# Altium PCB Transceiver.PcbDoc (part 1 of 2)
Units mm, origin at the board's own origin, x right, y up, seen from the top; angles counter-clockwise.
Board outline 140 x 70 mm, 2 copper layers (Top Layer, Bottom Layer); 116 components, 126 nets, 485 pads, 156 vias.
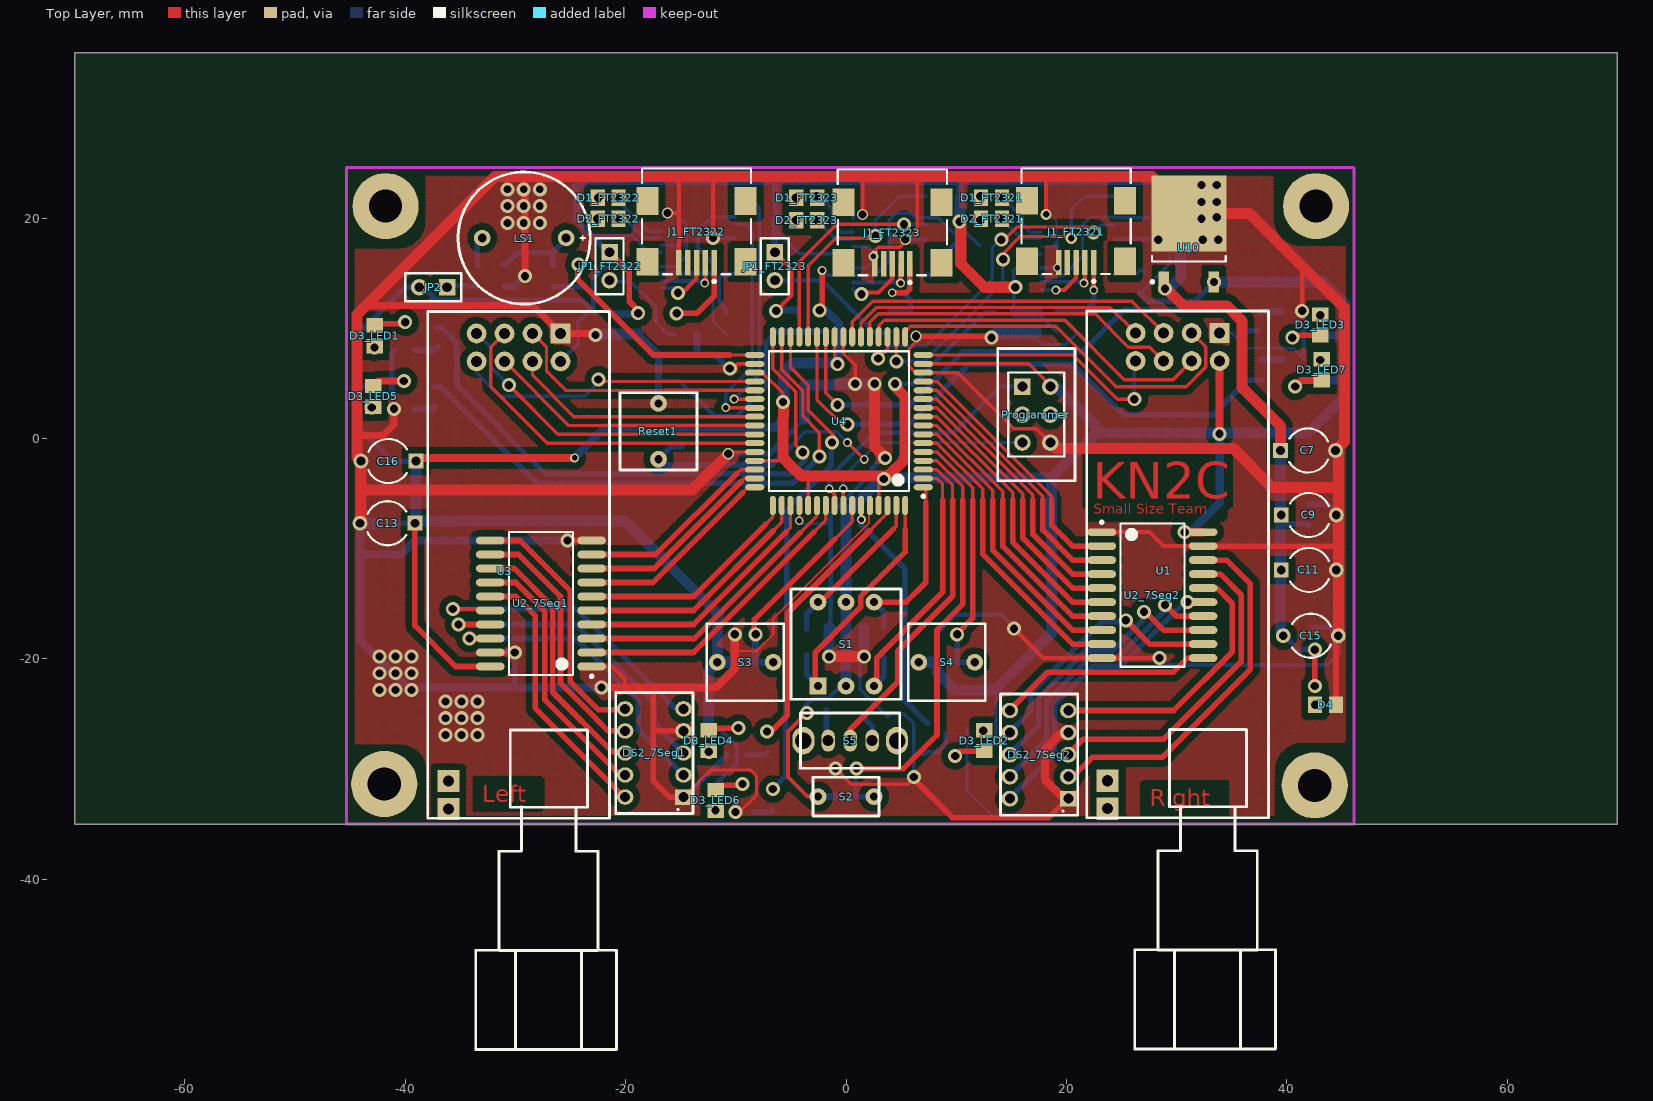
[diagram p0: Top Layer view]
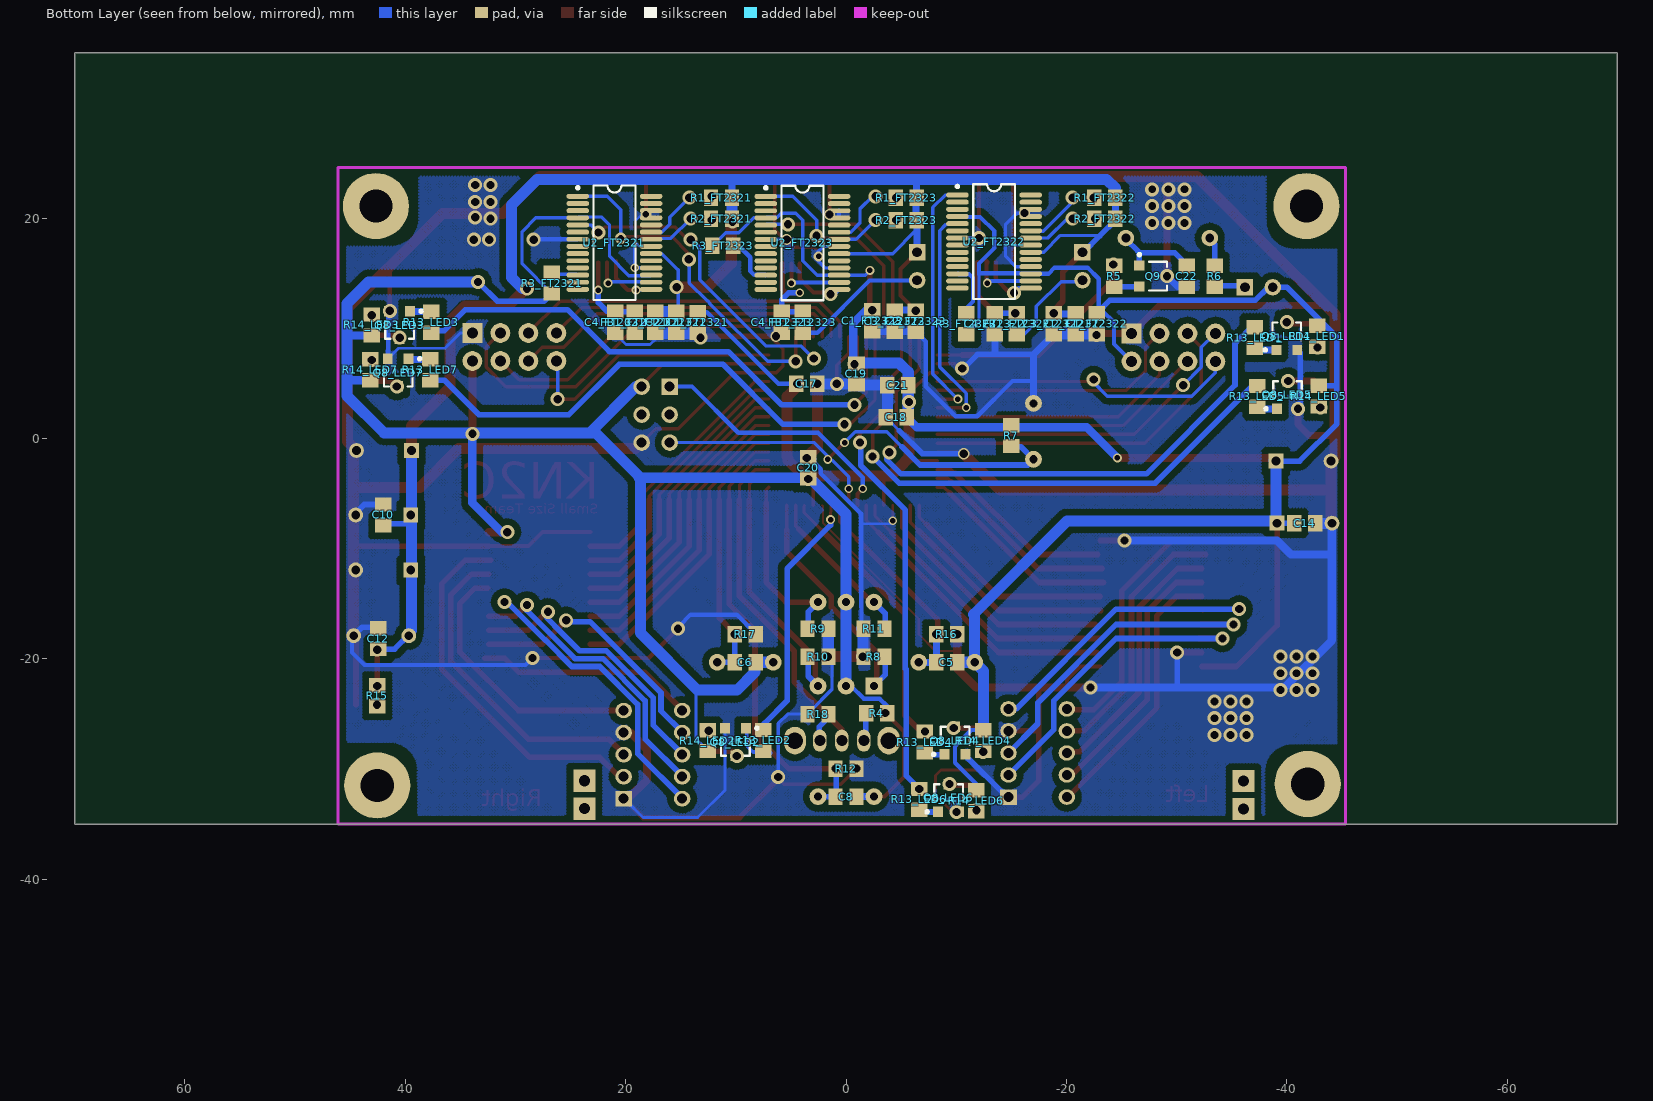
[diagram p1: Bottom Layer view, seen from below]

## Layer stack, top to bottom
Top Solder: solder mask 0.0102, Solder Resist, Dk 3.5
Top Layer: signal copper 0.0356
Dielectric1: dielectric 0.32, FR-4, Dk 4.8
Bottom Layer: signal copper 0.0356
Bottom Solder: solder mask 0.0102, Solder Resist, Dk 3.5

## Board outline
-70,-35 70,-35 70,35 -70,35

## Design rules (kind name [scope] priority, off if disabled: settings)
Clearance Clearance_1 [InPolygon] p1: gap=0.6
Clearance [All] p2: gap=0.2
FabricationTestPointUsage TestPointUsage [All] p1: valid=0 allowmultiple=FALSE
FabricationTestpoint Testpoint [All] p1: side=3 testpointundercomponent=TRUE minsize=1.016 maxsize=2.54 preferedsize=1.524 minholesize=0 maxholesize=1.016 preferedholesize=0.813 testpointgrid=0.025 allowsidetop=TRUE allowsidebottom=TRUE usegrid=TRUE gridtolerance=0
HoleSize [All] p1: absolutevalues=TRUE maxlimit=3 minlimit=0.025 maxpercent=80.000 minpercent=20.000
PolygonConnect [All] p1: connectstyle=Direct reliefconductorwidth=0.254 reliefentries=4 polygonreliefangle="90 Angle" airgapwidth=0.254
RoutingVias [All] p1: holewidth=0.5 width=1 viastyle="Through Hole" minholewidth=0.5 minwidth=0.5 maxholewidth=0.5 maxwidth=1
SilkToSolderMaskClearance SilkscreenOverComponentPads [IsPad] p1: minsilkscreentomaskgap=0.254 clearancetoexposedcopper=TRUE
SolderMaskExpansion [All] p1: expansion=0.102
Width [All] p1: maxlimit=2 minlimit=0.2 preferedwidth=0.5
25 further rules are at their usual default settings.

## Classes and differential pairs
channel class LED: LED1 LED2 LED3 LED4 LED5
net class LED[7..1]: LED1 LED2 LED3 LED4 LED5 LED6 LED7
component class Transceiver: C5 C6 C7 C8 C9 C10 C11 C12 C13 C14 C15 C16 C17 C18 C19 C20 C21 C22 C? CH1 D4 JP2 LS1 Programmer Q9 R4 R5 R6 R7 R8 R9 R10 R11 R12 R15 R16 R17 R18 Reset1 S1 S2 S3 S4 S5 U1 U3 U4 U9 U10 U11
component class LED4: D3_LED4 Q8_LED4 R13_LED4 R14_LED4
component class LED3: D3_LED3 Q8_LED3 R13_LED3 R14_LED3
component class LED2: D3_LED2 Q8_LED2 R13_LED2 R14_LED2
component class LED1: D3_LED1 Q8_LED1 R13_LED1 R14_LED1
component class 7Seg2: 3_7Seg2 DS2_7Seg2 U2_7Seg2
component class 7Seg1: 3_7Seg1 DS2_7Seg1 U2_7Seg1
channel class 7Seg: 7Seg1 7Seg2
net class RX[1..3]: RX1 RX2 RX3
net class TX[1..3]: TX1 TX2 TX3
component class LED5: D3_LED5 Q8_LED5 R13_LED5 R14_LED5
component class LED6: D3_LED6 Q8_LED6 R13_LED6 R14_LED6
component class LED7: D3_LED7 Q8_LED7 R13_LED7 R14_LED7
net class A[1..2]: A1 A2
net class B[1..2]: B1 B2
net class C[1..2]: C1 C2
net class D[1..2]: D1 D2
net class DP[1..2]: DP1 DP2
net class E[1..2]: E1 E2
net class F[1..2]: F1 F2
net class G[1..2]: G1 G2
component class FT2321: C1_FT2321 C2_FT2321 C3_FT2321 C4_FT2321 D1_FT2321 D2_FT2321 FB1_FT2321 J1_FT2321 R1_FT2321 R2_FT2321 R3_FT2321 U2_FT2321
component class FT2322: C1_FT2322 C2_FT2322 C3_FT2322 C4_FT2322 D1_FT2322 D2_FT2322 FB1_FT2322 J1_FT2322 JP1_FT2322 R1_FT2322 R2_FT2322 R3_FT2322 U2_FT2322
component class FT2323: C1_FT2323 C2_FT2323 C3_FT2323 C4_FT2323 D1_FT2323 D2_FT2323 FB1_FT2323 J1_FT2323 JP1_FT2323 R1_FT2323 R2_FT2323 R3_FT2323 U2_FT2323
channel class FT232: FT2321 FT2322 FT2323

## Components (designator, comment, footprint, x,y, rotation, side; value= is the part's Value field where it differs from the comment)
C1_FT2321 "Cap_UP" 2012[0805] 13.462,10.523 r90 bottom (schematic designator C1)
C1_FT2322 "Cap_UP" 2012[0805] -22.777,10.414 r90 bottom (schematic designator C1)
C1_FT2323 "Cap_UP" 2012[0805] -2.384,10.668 r90 bottom (schematic designator C1)
C2_FT2321 "Cap_UP" 2012[0805] 15.423,10.541 r90 bottom (schematic designator C2)
C2_FT2322 "Cap_UP" 2012[0805] -20.841,10.414 r90 bottom (schematic designator C2)
C2_FT2323 "Cap_UP" 2012[0805] -6.342,10.627 r90 bottom (schematic designator C2)
C3_FT2321 "Cap_El" 2012[0805] 17.315,10.541 r270 bottom (schematic designator C3)
C3_FT2322 "Cap_El" 2012[0805] -18.861,10.414 r270 bottom (schematic designator C3)
C3_FT2323 "Cap_El" 2012[0805] -4.437,10.627 r270 bottom (schematic designator C3)
C4_FT2321 "Cap_UP" 2012[0805] 20.955,10.541 r90 bottom (schematic designator C4)
C4_FT2322 "Cap_UP" 2012[0805] -13.503,10.414 r90 bottom (schematic designator C4)
C4_FT2323 "Cap_UP" 2012[0805] 5.842,10.541 r90 bottom (schematic designator C4)
C5 "Cap_UP" 2012[0805] -9.144,-20.32 r180 bottom
C6 "Cap_UP" 2012[0805] 9.144,-20.32 r180 bottom
C7 "Cap_El" EL_M#1 41.923,-1.099 r0 top
C8 "Cap_UP" 2012[0805] 0,-32.512 r180 bottom
C9 "Cap_El" EL_M#1 42.002,-6.955 r0 top
C10 "Cap_UP" 2012[0805] 42.002,-6.955 r270 bottom
C11 "Cap_El" EL_M#1 42.001,-11.938 r0 top
C12 "Cap_UP" 2012[0805] 42.435,-18.175 r270 bottom
C13 "Cap_El" EL_M#1 -41.606,-7.698 r180 top
C14 "Cap_UP" 2012[0805] -41.631,-7.711 r0 bottom
C15 "Cap_El" EL_M#2 42.18,-17.907 r0 top
C16 "Cap_El" EL_M#1 -41.529,-2.056 r180 top
C17 "Cap_UP" 2012[0805] 3.556,4.953 r0 bottom
C18 "Cap_UP" 2012[0805] -4.572,1.905 r180 bottom
C19 "Cap_UP" 2012[0805] -0.952,5.842 r90 bottom
C20 "Cap_UP" 2012[0805] 3.429,-2.667 r270 bottom
C21 "Cap_UP" 2012[0805] -4.699,4.826 r180 bottom
C22 "Cap_UP" 2012[0805] -30.931,14.724 r270 bottom
D1_FT2321 "Diode" 2012[0805] 13.208,21.844 r0 top (schematic designator D1)
D1_FT2322 "Diode" 2012[0805] -21.59,21.844 r0 top (schematic designator D1)
D1_FT2323 "Diode" 2012[0805] -3.568,21.832 r0 top (schematic designator D1)
D2_FT2321 "Diode" 2012[0805] 13.208,19.939 r0 top (schematic designator D2)
D2_FT2322 "Diode" 2012[0805] -21.59,19.939 r0 top (schematic designator D2)
D2_FT2323 "Diode" 2012[0805] -3.556,19.812 r0 top (schematic designator D2)
D3_LED1 "LED2" 2012[0805] -42.769,9.302 r90 top (schematic designator D3)
D3_LED2 "LED2" 2012[0805] 12.545,-27.432 r270 top (schematic designator D3)
D3_LED3 "LED2" 2012[0805] 43.053,10.292 r270 top (schematic designator D3)
D3_LED4 "LED2" 2012[0805] -12.477,-27.432 r90 top (schematic designator D3)
D3_LED5 "LED2" 2012[0805] -42.926,3.81 r90 top (schematic designator D3)
D3_LED6 "LED2" 2012[0805] -11.841,-32.863 r90 top (schematic designator D3)
D3_LED7 "LED2" 2012[0805] 43.18,6.228 r270 top (schematic designator D3)
D4 "Diode" 2012[0805] 43.524,-24.166 r0 top
DS2_7Seg1 "7Seg Blue-CC" "7Segment Small" -17.399,-28.555 r0 top (schematic designator DS2)
DS2_7Seg2 "7Seg Blue-CC" "7Segment Small" 17.526,-28.702 r0 top (schematic designator DS2)
FB1_FT2321 "Ferrite Beed" 2012[0805] 19.177,10.541 r90 bottom (schematic designator FB1)
FB1_FT2322 "Ferrite Beed" 2012[0805] -15.494,10.403 r90 bottom (schematic designator FB1)
FB1_FT2323 "Ferrite Beed" 2012[0805] 3.937,10.541 r90 bottom (schematic designator FB1)
J1_FT2321 "USB" USB_Mini 20.888,19.905 r180 top (schematic designator J1)
J1_FT2322 "USB" USB_Mini -13.56,19.892 r180 top (schematic designator J1)
J1_FT2323 "USB" USB_Mini 4.207,19.8 r180 top (schematic designator J1)
JP1_FT2322 "JUMPER" HDR1X2 -21.463,16.891 r270 top (schematic designator JP1)
JP1_FT2323 "JUMPER" HDR1X2 -6.46,16.891 r270 top (schematic designator JP1)
JP2 "JUMPER" HDR1X2 -36.195,13.716 r180 top
LS1 "Buzzer" BUZZER -29.21,18.183 r180 top
Programmer "Header 3X2" HDRBOX2X3 17.272,2.157 r270 top
Q8_LED1 "2N2222" SOT-23#1 -40.005,9.271 r180 bottom (schematic designator Q8)
Q8_LED2 "2N2222" SOT-23#1 10.033,-27.559 r0 bottom (schematic designator Q8)
Q8_LED3 "2N2222" SOT-23#1 40.513,10.287 r0 bottom (schematic designator Q8)
Q8_LED4 "2N2222" SOT-23#1 -9.906,-27.432 r180 bottom (schematic designator Q8)
Q8_LED5 "2N2222" SOT-23#1 -40.068,3.937 r180 bottom (schematic designator Q8)
Q8_LED6 "2N2222" SOT-23#1 -9.307,-32.639 r180 bottom (schematic designator Q8)
Q8_LED7 "2N2222" SOT-23#1 40.64,5.969 r0 bottom (schematic designator Q8)
Q9 "2N2222" SOT-23#2 -27.883,14.724 r270 bottom
R1_FT2321 "Res" 2012[0805] 11.303,21.844 r180 bottom (schematic designator R1)
R1_FT2322 "Res" 2012[0805] -23.495,21.844 r180 bottom (schematic designator R1)
R1_FT2323 "Res" 2012[0805] -5.461,21.844 r180 bottom (schematic designator R1)
R2_FT2321 "Res" 2012[0805] 11.303,19.939 r180 bottom (schematic designator R2)
R2_FT2322 "Res" 2012[0805] -23.495,19.939 r180 bottom (schematic designator R2)
R2_FT2323 "Res" 2012[0805] -5.461,19.812 r180 bottom (schematic designator R2)
R3_FT2321 "Res" 2012[0805] 26.714,14.097 r270 bottom (schematic designator R3)
R3_FT2322 "Res" 2012[0805] -10.922,10.414 r270 bottom (schematic designator R3)
R3_FT2323 "Res" 2012[0805] 11.176,17.473 r0 bottom (schematic designator R3)
R4 "Res" 2012[0805] -2.794,-24.932 r180 bottom
R5 "Res" 2012[0805] -24.327,14.724 r90 bottom
R6 "Res" 2012[0805] -33.471,14.724 r270 bottom
R7 "10K" 2012[0805] -14.986,0.254 r270 bottom
R8 "Res" 2012[0805] -2.54,-19.812 r180 bottom
R9 "Res" 2012[0805] 2.54,-17.272 r0 bottom
R10 "Res" 2012[0805] 2.54,-19.812 r0 bottom
R11 "Res" 2012[0805] -2.54,-17.272 r180 bottom
R12 "Res" 2012[0805] 0,-29.972 r0 bottom
R13_LED1 "Res" 2012[0805] -37.084,9.144 r270 bottom (schematic designator R13)
R13_LED2 "Res" 2012[0805] 7.493,-27.421 r270 bottom (schematic designator R13)
R13_LED3 "Res" 2012[0805] 37.624,10.541 r90 bottom (schematic designator R13)
R13_LED4 "Res" 2012[0805] -7.168,-27.559 r270 bottom (schematic designator R13)
R13_LED5 "Res" 2012[0805] -37.338,3.81 r270 bottom (schematic designator R13)
R13_LED6 "Res" 2012[0805] -6.64,-32.766 r270 bottom (schematic designator R13)
R13_LED7 "Res" 2012[0805] 37.719,6.223 r90 bottom (schematic designator R13)
R14_LED1 "Res" 2012[0805] -42.769,9.277 r90 bottom (schematic designator R14)
R14_LED2 "Res" 2012[0805] 12.545,-27.432 r270 bottom (schematic designator R14)
R14_LED3 "Res" 2012[0805] 43.053,10.292 r270 bottom (schematic designator R14)
R14_LED4 "Res" 2012[0805] -12.477,-27.432 r90 bottom (schematic designator R14)
R14_LED5 "Res" 2012[0805] -42.926,3.835 r90 bottom (schematic designator R14)
R14_LED6 "Res" 2012[0805] -11.805,-32.888 r90 bottom (schematic designator R14)
R14_LED7 "Res" 2012[0805] 43.18,6.228 r270 bottom (schematic designator R14)
R15 "Res" 2012[0805] 42.545,-23.368 r270 bottom
R16 "Res" 2012[0805] -9.144,-17.78 r0 bottom
R17 "Res" 2012[0805] 9.144,-17.78 r0 bottom
R18 "Res" 2012[0805] 2.54,-25.019 r0 bottom
Reset1 "SW-SPST" PUSH-BUT -17.018,0.635 r180 top
S1 "SW-Hex" SW-HEX 0,-18.669 r0 top
S2 "SW-SPST" PUSH-BUT-SMD 0,-32.512 r90 top
S3 "SW-SPST" PUSH-BUT -9.144,-20.32 r90 top
S4 "SW-SPST" PUSH-BUT 9.144,-20.32 r90 top
S5 "SW-SPDT" SW-SPDT 0.381,-27.432 r0 top
U1 "nrf24L01" NRF24L01+PA+LNA 28.829,-12.025 r270 top locked
U2_7Seg1 "74ACT541SC" M20B_M -27.686,-14.986 r180 top (schematic designator U2)
U2_7Seg2 "74ACT541SC" M20B_M 27.813,-14.224 r0 top (schematic designator U2)
U2_FT2321 "FT232RL" SSOP28 21.015,17.746 r270 bottom (schematic designator U2)
U2_FT2322 "FT232RL" SSOP28 -13.44,17.86 r270 bottom (schematic designator U2)
U2_FT2323 "FT232RL" SSOP28 3.953,17.733 r270 bottom (schematic designator U2)
U3 "nrf24L01" NRF24L01+PA+LNA -30.988,-12.065 r270 top locked
U4 "ATXmega64A3" 64A_N -0.635,1.565 r180 top locked
U10 "LF33" D-PACK 31.115,18.545 r90 top

## Footprints (in the part's own frame and the unit in brackets; to place one, negate y for a bottom-side part, rotate by r counter-clockwise, add the part's x,y. Pads: shape width x height; smd on the part's side, far side on the other; paste and mask are expansions set on the pad)
"7Segment Small" [mm]
  rect 1.5x1.4 hole 0.9: 1(2.65,-4)
  oval 1.5x1.4 hole 0.9: 2(2.65,-2) 3(2.65,0) 4(2.65,2) 5(2.65,4) 6(-2.65,4) 7(-2.65,2) 8(-2.65,0) 9(-2.65,-2) 10(-2.65,-4)
  silkscreen extent -3.5,-5.5 3.5,5.5, body extent -3.54,-5.48 3.5,5.55, height 4.8
64A_N [mm] "Thin QFP, 64-Leads, Body 14x14mm, Pitch 0.8mm, IPC Medium Density"
  oval 1.75x0.55 smd: 1(-7.65,6) 2(-7.65,5.2) 3(-7.65,4.4) 4(-7.65,3.6) 5(-7.65,2.8) 6(-7.65,2) 7(-7.65,1.2) 8(-7.65,0.4) 9(-7.65,-0.4) 10(-7.65,-1.2) 11(-7.65,-2) 12(-7.65,-2.8) 13(-7.65,-3.6) 14(-7.65,-4.4) 15(-7.65,-5.2) 16(-7.65,-6) 33(7.65,-6) 34(7.65,-5.2) 35(7.65,-4.4) 36(7.65,-3.6) 37(7.65,-2.8) 38(7.65,-2) 39(7.65,-1.2) 40(7.65,-0.4) 41(7.65,0.4) 42(7.65,1.2) 43(7.65,2) 44(7.65,2.8) 45(7.65,3.6) 46(7.65,4.4) 47(7.65,5.2) 48(7.65,6)
  oval 0.55x1.75 smd: 17(-6,-7.65) 18(-5.2,-7.65) 19(-4.4,-7.65) 20(-3.6,-7.65) 21(-2.8,-7.65) 22(-2,-7.65) 23(-1.2,-7.65) 24(-0.4,-7.65) 25(0.4,-7.65) 26(1.2,-7.65) 27(2,-7.65) 28(2.8,-7.65) 29(3.6,-7.65) 30(4.4,-7.65) 31(5.2,-7.65) 32(6,-7.65) 49(6,7.65) 50(5.2,7.65) 51(4.4,7.65) 52(3.6,7.65) 53(2.8,7.65) 54(2,7.65) 55(1.2,7.65) 56(0.4,7.65) 57(-0.4,7.65) 58(-1.2,7.65) 59(-2,7.65) 60(-2.8,7.65) 61(-3.6,7.65) 62(-4.4,7.65) 63(-5.2,7.65) 64(-6,7.65)
  silkscreen extent -7.78,-6.35 6.35,6.95, body extent -7,-7 7,7, height 1.2
2012[0805] [mm] "Chip Resistor; Body 2.0 x 1.3 mm (LxW typ)"
  rect 1.3x1.5 smd: 1(-0.95,0) 2(0.95,0)
  body extent -1.22,-0.75 1.28,0.75, height 0.5
BUZZER [mm]
  round 1.5 hole 0.8: 1(-3.81,0) 2(3.81,0)
  silkscreen extent -6,-6 6,6, body extent -5.97,-6 5.97,5.97, height 9.3
D-PACK [mm] "D-PAK, 3-Pads, Body 6.2x6.7mm (max), IPC Medium Density"
  rect 1.9x0.95 smd: 1(-4.35,2.28) 3(-4.35,-2.28)
  rect 6.9x6.8 smd: 4(1.85,0)
  silkscreen extent -4.47,-3.35 -2,3.43, body extent -2.5,-3.35 3.7,3.35, height 2.38
EL_M#1 [mm]
  rect 1.35x1.35 hole 0.8: 1(-2.5,0)
  round 1.35 hole 0.8: 2(2.5,0)
  silkscreen extent -1.69,-2 1.82,2, body extent -1.92,-2 1.97,2.02, height 17
EL_M#2 [mm]
  round 1.35 hole 0.8: 1(-2.5,0) 2(2.5,0)
  silkscreen extent -1.69,-2 1.82,2, body extent -1.92,-2 1.97,2.02, height 17
HDR1X2 [mm] "Connector; Header; 2 Position"
  rect 1.5x1.5 hole 0.9: 1(0,0)
  round 1.5 hole 0.9: 2(2.54,0)
  silkscreen extent -1.27,-1.27 3.81,1.27
HDRBOX2X3 [mm]
  rect 1.5x1.5 hole 0.9: 1(-2.54,-1.27)
  round 1.5 hole 0.9: 2(-2.54,1.27) 3(0,-1.27) 4(0,1.27) 5(2.54,-1.27) 6(2.54,1.27)
  silkscreen extent -6,-3.5 6,3.5, body extent -6,-3.52 6,3.47, height 4
M20B_M [mm] "SOIC, 20-Leads, Body 12.8x7.5mm, Pitch 1.27mm, IPC Low Density"
  oval 2.6x0.7 smd: 1(-4.6,5.715) 2(-4.6,4.445) 3(-4.6,3.175) 4(-4.6,1.905) 5(-4.6,0.635) 6(-4.6,-0.635) 7(-4.6,-1.905) 8(-4.6,-3.175) 9(-4.6,-4.445) 10(-4.6,-5.715) 11(4.6,-5.715) 12(4.6,-4.445) 13(4.6,-3.175) 14(4.6,-1.905) 15(4.6,-0.635) 16(4.6,0.635) 17(4.6,1.905) 18(4.6,3.175) 19(4.6,4.445) 20(4.6,5.715)
  silkscreen extent -4.72,-6.5 2.9,6.74, body extent -3.75,-6.5 3.75,6.5, height 2.6
NRF24L01+PA+LNA [mm]
  rect 1.8x1.8 hole 1: 1(-21.59,5.08)
  round 1.8 hole 1: 2(-19.05,5.08) 3(-21.59,2.54) 4(-19.05,2.54) 5(-21.59,0) 6(-19.05,0) 7(-21.59,-2.54) 8(-19.05,-2.54)
  rect 2x2 hole 1: 25(19.05,-5.08) 26(21.59,-5.08)
  silkscreen extent -23.59,-6.98 43.41,10.16
PUSH-BUT [mil]
  round 60 hole 29.53: 1(0,-100) 2(0,100)
  silkscreen extent -138,-138 138,138, body extent -139,-139 139,139, height 157
PUSH-BUT-SMD [mil]
  round 60 hole 29.53: 1(0,-100) 2(0,100)
  silkscreen extent -69,-118 69,118, body extent -69,-118 68,117, height 157
SOT-23#1 [mm] "SOT-23; 3 Leads; Body 3.0 x 2.6 mm, inc. leads (LxW max)"
  rect 0.9x0.95 smd: 1(0,1.25) 2(-0.95,-1.25) 3(0.95,-1.25)
  silkscreen extent -2.08,-1.37 1.3,1.25, body extent -1.33,-0.38 1.33,1.25, height 2
SOT-23#2 [mm] "SOT-23; 3 Leads; Body 3.0 x 2.6 mm, inc. leads (LxW max)"
  rect 0.9x0.95 smd: 1(-0.95,-1.25) 2(0.95,-1.25) 3(0,1.25)
  silkscreen extent -2.07,-1.38 1.3,1.25
SSOP28 [mm] "SSOP; 28 Leads; Body Width 5.3 mm; Pitch 0.65 mm"
  oval 0.45x2.05 smd: 1(-4.225,-3.325) 2(-3.575,-3.325) 3(-2.925,-3.325) 4(-2.275,-3.325) 5(-1.625,-3.325) 6(-0.975,-3.325) 7(-0.325,-3.325) 8(0.325,-3.325) 9(0.975,-3.325) 10(1.625,-3.325) 11(2.275,-3.325) 12(2.925,-3.325) 13(3.575,-3.325) 14(4.225,-3.325) 15(4.225,3.325) 16(3.575,3.325) 17(2.925,3.325) 18(2.275,3.325) 19(1.625,3.325) 20(0.975,3.325) 21(0.325,3.325) 22(-0.325,3.325) 23(-0.975,3.325) 24(-1.625,3.325) 25(-2.275,3.325) 26(-2.925,3.325) 27(-3.575,3.325) 28(-4.225,3.325)
  silkscreen extent -5.2,-3.45 5.2,1.9, body extent -5.2,-2.4 5.23,2.42, height 2
SW-HEX [mil]
  rect 60x60 hole 29.53: 1(-100,-150)
  round 60 hole 29.53: 2(0,-150) 3(100,-150) 4(100,150) 5(0,150) 6(-100,150)
  silkscreen extent -197,-197 197,197, body extent -198,-199 195,197, height 79
SW-SPDT [mm]
  oval 2x2.5 hole 1.5: 0(-4.25,0) 0(4.25,0)
  oval 1.2x2 hole 1: 1(-2,0) 2(0,0) 3(2,0)
  silkscreen extent -4.5,-2.5 4.5,2.5, body extent -4.52,-2.54 4.47,2.49, height 5
USB_Mini [mm]
  rect 0.5x2.3 smd: 1(-1.6,3.95) 2(-0.8,3.95) 3(0,3.95) 4(0.8,3.95) 5(1.6,3.95)
  rect 2x2.5 smd: 6(4.45,3.85) 7(4.45,-1.65) 8(-4.45,3.85) 9(-4.45,-1.65)
  silkscreen extent -4.95,-4.6 4.95,5.77

## Part data
C1_FT2321 C1_FT2322 C1_FT2323 C2_FT2321 C2_FT2322 C2_FT2323 C3_FT2321 C3_FT2322 C3_FT2323 C4_FT2321 C4_FT2322 C4_FT2323 C5 C6 C7 C8 C9 C10 C11 C12 C13 C14 C15 C16 C17 C18 C19 C20 C21 C22: "Capacitor"
D1_FT2321 D1_FT2322 D1_FT2323 D2_FT2321 D2_FT2322 D2_FT2323 D4: "1 Amp General Purpose Rectifier"
D3_LED1 D3_LED2 D3_LED3 D3_LED4 D3_LED5 D3_LED6 D3_LED7: library part Diode, "1 Amp General Purpose Rectifier"
DS2_7Seg1 DS2_7Seg2: library part "7Seg Blue-CC_1", "14.2 mm General Purpose Blue 7-Segment Display: CC, RH DP, Gray Surface"
J1_FT2321 J1_FT2322 J1_FT2323: "USB 1.1, Right Angle, Thru-Hole, A Type, Receptacle, 4 Position, Black"
LS1: "Magnetic Transducer Buzzer"
Programmer: "Header, 3-Pin, Dual row"
Q8_LED1 Q8_LED2 Q8_LED3 Q8_LED4 Q8_LED5 Q8_LED6 Q8_LED7 Q9: "NPN Bipolar Transistor"
R1_FT2321 R1_FT2322 R1_FT2323 R2_FT2321 R2_FT2322 R2_FT2323 R3_FT2321 R3_FT2322 R3_FT2323 R4 R5 R6 R8 R9 R10 R11 R12 R13_LED1 R13_LED2 R13_LED3 R13_LED4 R13_LED5 R13_LED6 R13_LED7 R14_LED1 R14_LED2 R14_LED3 R14_LED4 R14_LED5 R14_LED6 R14_LED7 R15 R16 R17 R18: "Semiconductor Resistor"
R7: library part Res, "Semiconductor Resistor"
Reset1 S2 S3 S4: "Single-Pole, Single-Throw Switch"
S5: "SPDT Subminiature Toggle Switch, Right Angle Mounting, Vertical Actuation"
U2_7Seg1 U2_7Seg2: "Octal Buffer/Line Driver with 3-State Output"
U10: library part 7805

## Free pads (board coordinates)
  round 6 hole 3: 19(-41.91,-31.369) 19(-41.783,21.082) 19(42.545,-31.496) 19(42.672,21.082)

## Via types
v1: diameter 1.27, hole 0.75, Top Layer to Bottom Layer, 103 vias
v2: diameter 1.27, hole 0.711, Top Layer to Bottom Layer, 27 vias
v3: diameter 0.8, hole 0.5, Top Layer to Bottom Layer, 14 vias
v4: diameter 1.016, hole 0.75, Top Layer to Bottom Layer, 5 vias
v5: diameter 0.762, hole 0.5, Top Layer to Bottom Layer, 2 vias
v6: diameter 1.016, hole 0.6, Top Layer to Bottom Layer, 2 vias
v7: diameter 0.85, hole 0.5, Top Layer to Bottom Layer, 1 vias
v8: diameter 1.27, hole 0.8, Top Layer to Bottom Layer, 1 vias
v9: diameter 0.889, hole 0.5, Top Layer to Bottom Layer, 1 vias

## Nets (pads, with @x,y where several pads share a name; then routed paths per layer and width w, separated by ;. In a path a pad name is that pad's centre, name@x,y a point inside that pad or via, vN(x,y) a via of type N, cw(c..) or ccw(c..) an arc to the next point about the centre after c; other vN are vias at no path point)
2A_7Seg1: DS2_7Seg1.6 U2_7Seg1.11 | length 23.5
  Top Layer w0.508: U2_7Seg1.11@-32.286,-9.271 -29.591,-9.271 -25.019,-13.843 -25.019,-22.098 -22.479,-24.638 DS2_7Seg1.6@-19.939,-24.638
2A_7Seg2: DS2_7Seg2.6 U2_7Seg2.11 | length 19.9
  Top Layer w0.508: DS2_7Seg2.6@14.82,-24.702 18.313,-21.209 29.718,-21.209 30.988,-19.939 U2_7Seg2.11@32.413,-19.939 U2_7Seg2.11@32.766,-19.939
2B_7Seg1: DS2_7Seg1.5 U2_7Seg1.16 | length 28
  Top Layer w0.381: v1(-35.687,-15.494) -32.512,-15.494 U2_7Seg1.16@-32.385,-15.621
  Bottom Layer w0.508: v1(-35.687,-15.494) -24.511,-15.494 -15.45,-24.555 DS2_7Seg1.5@-14.749,-24.555
2B_7Seg2: DS2_7Seg2.5 U2_7Seg2.16 | length 24.7
  Top Layer w0.508: DS2_7Seg2.5@20.12,-24.702 29.737,-24.702 35.052,-19.387 35.052,-14.986 33.655,-13.589 U2_7Seg2.16@32.512,-13.589
2C_7Seg1: DS2_7Seg1.3 U2_7Seg1.17 | length 29.3
  Top Layer w0.508: v1(-35.179,-16.891) U2_7Seg1.17@-32.286,-16.891 U2_7Seg1.17@-32.258,-16.891
  Bottom Layer w0.508: v1(-35.179,-16.891) -24.511,-16.891 -17.399,-24.003 -17.399,-25.905 DS2_7Seg1.3@-14.749,-28.555
2C_7Seg2: DS2_7Seg2.3 U2_7Seg2.17 | length 29.6
  Top Layer w0.508: DS2_7Seg2.3@20.12,-28.702 21.517,-27.305 28.829,-27.305 35.877,-20.256 35.877,-14.202 33.994,-12.319 U2_7Seg2.17@32.413,-12.319
2D_7Seg1: DS2_7Seg1.10 U2_7Seg1.15 | length 24.7
  Top Layer w0.508: U2_7Seg1.15@-32.286,-14.351 -29.972,-14.351 -28.194,-16.129 -28.194,-24.511 DS2_7Seg1.10@-20.066,-32.639
2D_7Seg2: DS2_7Seg2.10 U2_7Seg2.15 | length 26.5
  Bottom Layer w0.508: DS2_7Seg2.10@14.82,-32.702 18.916,-28.606 18.916,-24.137 22.352,-20.701 24.892,-20.701 27.286,-18.307 ; 27.305,-18.288 27.286,-18.307 ; v1@31.242,-14.859 v1(30.988,-14.859) 30.75,-14.859 27.302,-18.307 27.286,-18.307
2DP_7Seg1: DS2_7Seg1.2 U2_7Seg1.18 | length 28.2
  Top Layer w0.508: v1(-34.163,-18.161) U2_7Seg1.18@-32.286,-18.161 U2_7Seg1.18@-32.004,-18.161
  Bottom Layer w0.508: v1(-34.163,-18.161) -24.511,-18.161 -18.845,-23.827 -18.845,-26.459 DS2_7Seg1.2@-14.749,-30.555
2DP_7Seg2: DS2_7Seg2.2 U2_7Seg2.18 | length 33.7
  Top Layer w0.508: DS2_7Seg2.2@20.12,-30.702 20.606,-30.702 22.352,-28.956 28.702,-28.956 36.703,-20.955 36.703,-13.208 34.544,-11.049 U2_7Seg2.18@32.413,-11.049 U2_7Seg2.18@32.258,-11.049
2E_7Seg1: DS2_7Seg1.9 U2_7Seg1.14 | length 24.2
  Top Layer w0.508: U2_7Seg1.14@-32.286,-13.081 -29.972,-13.081 -27.324,-15.729 -27.324,-23.73 -20.32,-30.734 DS2_7Seg1.9@-20.066,-30.734
2E_7Seg2: DS2_7Seg2.9 U2_7Seg2.14 | length 26.6
  Top Layer w0.508: v1@29.083,-15.24 29.972,-16.129 U2_7Seg2.14@32.413,-16.129
  Bottom Layer w0.508: DS2_7Seg2.9@14.82,-30.702 18.208,-27.314 18.208,-23.82 ; 18.232,-23.82 22.059,-19.993 24.599,-19.993 28.956,-15.636 v1(28.956,-15.113)
2F_7Seg1: DS2_7Seg1.7 U2_7Seg1.12 | length 23.8
  Top Layer w0.508: U2_7Seg1.12@-32.639,-10.541 U2_7Seg1.12@-32.286,-10.541 -29.718,-10.541 -25.908,-14.351 -25.908,-22.21 -22.772,-25.346 -22.772,-25.361 -21.59,-26.543 DS2_7Seg1.7@-20.066,-26.543 ; DS2_7Seg1.7@-20.063,-26.54 DS2_7Seg1.7@-20.049,-26.555
2F_7Seg2: DS2_7Seg2.7 U2_7Seg2.12 | length 23.8
  Top Layer w0.508: v1(25.4,-16.51) 27.559,-18.669 U2_7Seg2.12@32.413,-18.669
  Bottom Layer w0.508: DS2_7Seg2.7@14.82,-26.702 16.792,-24.73 16.792,-23.086 23.241,-16.637 v1@25.4,-16.637 ; v1@25.273,-16.51 v1@25.4,-16.383
2G_7Seg1: DS2_7Seg1.8 U2_7Seg1.13 | length 24.1
  Top Layer w0.508: U2_7Seg1.13@-32.286,-11.811 -30.099,-11.811 -26.616,-15.294 -26.616,-23.041 -21.209,-28.448 DS2_7Seg1.8@-20.32,-28.448 ; DS2_7Seg1.8@-20.066,-28.702 DS2_7Seg1.8@-20.32,-28.448 ; DS2_7Seg1.8@-19.939,-28.448 DS2_7Seg1.8@-20.32,-28.448
2G_7Seg2: DS2_7Seg2.8 U2_7Seg2.13 | length 25.8
  Top Layer w0.508: v1@27.051,-15.621 28.829,-17.399 U2_7Seg2.13@32.413,-17.399
  Bottom Layer w0.508: DS2_7Seg2.8@14.82,-28.702 17.5,-26.022 17.5,-23.527 21.742,-19.285 24.165,-19.285 26.489,-16.961 26.489,-16.945 27.178,-16.256 v1@27.178,-15.748 ; v1@26.924,-15.875 v1(27.051,-15.748)
3.3V: C1_FT2321.2 C1_FT2322.2 C1_FT2323.2 C5.2 C6.2 C8.2 C13.1 C14.2 C16.1 C17.2 C18.2 C19.2 C20.2 C21.2 JP2.2 Programmer.2 R3_FT2321.2 R3_FT2322.2 R3_FT2323.2 R4.2 R7.1 R14_LED1.2 R14_LED2.2 R14_LED3.2 R14_LED4.2 R14_LED5.2 R14_LED6.2 R14_LED7.2 S1.2 S1.5 S2.2 S3.2 S4.2 U1.2 U2_7Seg1.20 U2_7Seg2.20 U2_FT2321.4 U2_FT2321.17 U2_FT2322.4 U2_FT2322.17 U2_FT2323.4 U2_FT2323.17 U3.2 U4.15 U4.25 U4.35 U4.45 U4.53 U4.61 U10.3 | length 485.8
  Top Layer w0.305: U4.45@-8.285,-2.035 -5.986,-2.035 ; U4.35@-8.285,5.965 -7.598,5.965 -5.715,4.082 v1(-5.715,3.302) ; U4.53@-3.435,-6.085 -3.435,-3.556 ; v1@-1.035,6.875 U4.25@-1.035,9.215 ; U4.61@2.965,-6.085 v1@2.965,-3.981 ; U4.15@6.981,6.731 U4.15@7.015,6.765 16.603,6.765 Programmer.2@18.669,4.699
  Top Layer w0.381: v1(-3.556,-24.929) -3.583,-24.929 -5.259,-26.606 -5.259,-30.735 -3.483,-32.512 S2.2@-2.54,-32.512
  Top Layer w0.5: -4.977,-2.752 -4.977,-2.502
  Top Layer w0.508: C13.1@-39.106,-7.698 -39.134,-7.727 -39.134,-17 -35.433,-20.701 U2_7Seg1.20@-32.286,-20.701 ; v1(-2.384,11.618) -2.286,11.618 -2.171,11.733 v3(-2.171,15.24)
  Top Layer w0.75: C16.1@-38.989,-2.032 -38.735,-1.778 v7(-24.638,-1.778) ; v1(30.734,-8.509) U2_7Seg2.20@32.413,-8.509 ; v1@33.909,0.861 U1.2@33.909,7.025
  Top Layer w1: C16.1@-39.134,-2.161 C16.1@-39.029,-2.056 ; -5.715,-1.651 -5.715,1.47 v1@-5.649,3.3 ; -5.588,-1.89 -4.977,-2.502 -4.049,-3.429 3.81,-3.429 5.254,-1.985 5.254,-1.778 5.334,-1.698 5.334,3.81 v1@4.445,4.699
  Bottom Layer w0.254: R14_LED2.2@12.545,-28.382 12.545,-28.344 13.622,-27.267 13.622,-23.147 13.462,-22.987
  Bottom Layer w0.3: 19.812,14.859 21.463,16.51
  Bottom Layer w0.305: -12.073,14.859 -12.073,10.617 R3_FT2322.2@-10.922,9.464 R3_FT2322.2@-10.922,9.464 ; v3(-2.171,15.24) -1.74,14.808 U2_FT2323.17@0.628,14.808 2.616,14.808 3.937,16.129 3.937,19.812 4.572,20.447 5.873,20.447 6.239,20.081 7.206,20.081 U2_FT2323.4@7.278,20.008 8.385,20.008 9.717,18.677 10.922,18.677 R3_FT2323.2@12.126,17.473 ; U2_FT2321.17@17.69,14.821 17.75,14.761 19.714,14.761 19.812,14.859 ; 21.463,16.51 21.463,19.358 22.198,20.093 24.267,20.093 U2_FT2321.4@24.34,20.021 28.144,20.021 29.403,18.762 29.403,15.836 R3_FT2321.2@26.714,13.147
  Bottom Layer w0.381: U3.2@-25.908,6.985 -24.319,8.574 -24.319,10.541 -23.334,11.526 -22.939,11.526 -22.939,14.488 -21.935,15.492 -18.923,15.492 -18.367,14.935 U2_FT2322.17@-16.765,14.935 -16.731,14.97 -15.71,14.97 -15.694,14.986 -12.192,14.986 ; R14_LED4.2@-12.477,-26.482 -11.364,-26.482 -9.906,-27.94 -9.906,-29.438 R14_LED6.2@-11.902,-31.434 ; -12.065,14.859 -12.065,15.875 -13.462,17.272 -13.462,18.813 -12.174,20.101 -10.15,20.101 U2_FT2322.4@-10.115,20.135 ; R4.2@-3.744,-24.932 -3.744,-24.318 -3.057,-23.631 -1.616,-23.631 -0.464,-22.479 S1.2@0,-22.479 ; C17.2@4.506,4.953 6.115,4.953 12.635,11.473 C1_FT2321.2@13.462,11.473
  Bottom Layer w0.5: R14_LED5.2@-42.926,4.785 -44.503,4.785 -44.544,4.826 ; C16.1@-39.029,-2.056 -41.177,-2.056 -44.544,1.311 -44.544,4.826 ; C1_FT2322.2@-22.777,11.364 -22.939,11.526 -23.929,12.516 -37.131,12.516 -38.331,13.716 JP2.2@-38.735,13.716 -40.005,13.716 -44.544,9.177 -44.544,4.826
  Bottom Layer w0.508: C14.2@-40.681,-7.711 -39.152,-7.711 C13.1@-39.116,-7.747 ; R3_FT2321.2@26.714,13.147 27.415,12.446 31.646,12.446 v1(33.395,14.195)
  Bottom Layer w0.635: S2.2@-2.54,-32.512 C8.2@-0.95,-32.512
  Bottom Layer w0.75: v7(-24.638,-1.778) -21.844,1.016 -6.411,1.016 C18.2@-5.522,1.905 ; v1(-2.384,11.618) -1.811,11.618 -0.658,10.465 C19.2@-0.658,7.086 ; v1(30.734,-8.509) 31.258,-8.509 33.925,-5.842 33.925,0.479 v1@33.896,0.508 ; R14_LED3.2@43.053,9.342 45.203,9.342 45.212,9.333 ; R14_LED7.2@43.18,5.278 45.156,5.278 45.212,5.334
  Bottom Layer w1: C16.1@-39.029,-2.056 -39.029,-7.58 C13.1@-39.008,-7.601 ; C13.1@-38.989,-7.62 C13.1@-39.008,-7.601 ; C16.1@-38.958,-2.128 C16.1@-38.862,-2.032 ; R14_LED4.2@-12.477,-26.482 -12.477,-21.113 S3.2@-11.684,-20.32 -11.684,-15.875 ; S3.2@-11.557,-20.193 -11.43,-20.32 C5.2@-10.094,-20.32 ; -11.557,-16.002 -11.684,-15.875 ; C18.2@-5.649,1.905 C21.2@-5.649,4.826 -5.649,6.035 -4.826,6.858 -1.018,6.858 C19.2@-0.952,6.792 ; S1.2@0,-22.479 S1.5@0,-14.859 0,-6.858 C20.2@2.904,-3.954 ; C20.2@3.429,-3.617 18.796,-3.556 ; S4.2@6.604,-20.32 C6.2@8.194,-20.32 8.255,-20.381 8.255,-21.209 9.906,-22.86 13.462,-22.86 18.669,-17.653 18.669,-3.617 18.608,-3.617 22.733,0.508 23.241,0.508 ; Programmer.2@18.542,4.697 19.052,4.697 23.241,0.508 ; v1(33.395,14.195) 43.336,14.195 45.274,12.257 45.274,3.854 41.928,0.508 33.896,0.508 23.241,0.508 ; C13.1@-39.008,-7.601 -38.9,-7.493 -20.066,-7.493 -11.684,-15.875
  other v1: 3.429,-3.683 33.909,0.409 4.445,4.953 -0.781,6.731
A1: U2_7Seg1.9 U4.46 | length 17.8
  Top Layer w0.305: -9.906,-3.175 -9.566,-2.835 U4.46@-8.285,-2.835
  Top Layer w0.508: U2_7Seg1.9@-22.86,-10.541 -17.272,-10.541 -9.906,-3.175
A2: U2_7Seg2.9 U4.6 | length 27.2
  Top Layer w0.3: U4.6@7.015,-0.435 8.255,-0.435 12.402,-4.582 12.402,-5.59
  Top Layer w0.5: 12.402,-5.59 12.402,-10.497 20.574,-18.669 U2_7Seg2.9@23.213,-18.669
B1: U2_7Seg1.4 U4.51 | length 23.2
  Top Layer w0.305: -5.461,-8.509 -5.035,-8.083 -5.035,-7.702 U4.51@-5.035,-6.085
  Top Layer w0.508: U2_7Seg1.4@-22.606,-16.891 -14.224,-16.891 -13.843,-16.891 -5.461,-8.509
B2: U2_7Seg2.4 U4.11 | length 24.9
  Top Layer w0.3: U4.11@7.015,3.565 8.255,3.565 16.951,-5.131 16.951,-5.59
  Top Layer w0.5: 16.951,-5.59 16.951,-8.696 20.574,-12.319 U2_7Seg2.4@23.213,-12.319
BUZ: R5.2 U4.33 | length 20.2
  Top Layer w0.305: -10.541,7.565 U4.33@-8.285,7.565
  Top Layer w0.508: v1@-24.346,15.693 -24.346,14.416 -17.495,7.565 -10.541,7.565
  other v1: -24.257,15.782
C1: U2_7Seg1.3 U4.54 | length 26.1
  Top Layer w0.305: -4.143,-8.557 -2.635,-7.049 U4.54@-2.635,-6.085
  Top Layer w0.508: U2_7Seg1.3@-23.103,-18.15 -23.114,-18.161 U2_7Seg1.3@-23.086,-18.161 -13.747,-18.161 -4.143,-8.557
C2: U2_7Seg2.3 U4.12 | length 24.4
  Top Layer w0.3: U4.12@7.015,4.365 8.255,4.365 17.861,-5.241 17.861,-5.59
  Top Layer w0.5: 17.861,-5.59 17.861,-8.336 20.574,-11.049 U2_7Seg2.3@23.213,-11.049
CE1: U1.3 U4.17 | length 34.6
  Top Layer w0.305: U4.17@5.365,9.215 5.365,9.683 5.842,10.16 19.05,10.16 24.511,4.699 30.861,4.699 32.639,6.477 32.639,8.295 U1.3@31.369,9.565
CE2: U3.3 U4.37 | length 23.6
  Top Layer w0.305: U3.3@-28.448,9.525 -27.178,8.255 -27.178,6.096 -25.429,4.347 -16.481,4.347 ; -16.51,4.318 -16.481,4.347 ; U4.37@-8.285,4.365 -16.463,4.365 -16.481,4.347
CSN1: U1.4 U4.20 | length 32.5
  Top Layer w0.305: U4.20@2.965,9.215 2.965,10.204 3.492,10.731 19.875,10.731 25.273,5.334 29.678,5.334 U1.4@31.369,7.025
CSN2: U3.4 U4.40 | length 23
  Top Layer w0.305: U3.4@-28.448,6.985 -28.448,5.715 -24.698,1.965 U4.40@-8.285,1.965
D1: U2_7Seg1.5 U4.50 | length 22.1
  Top Layer w0.305: -6.604,-8.382 -5.835,-7.613 U4.50@-5.835,-6.085
  Top Layer w0.508: U2_7Seg1.5@-23.114,-15.621 U2_7Seg1.5@-23.086,-15.621 -13.843,-15.621 -6.604,-8.382
D2: U2_7Seg2.5 U4.10 | length 25.3
  Top Layer w0.3: U4.10@7.015,2.765 8.255,2.765 16.041,-5.021 16.041,-5.59
  Top Layer w0.5: 16.041,-5.59 16.041,-9.056 20.574,-13.589 U2_7Seg2.5@23.213,-13.589
DM_FT2321: J1_FT2321.2 U2_FT2321.16 | length 5.7
  Top Layer w0.381: v3@21.59,14.224 21.688,14.322 J1_FT2321.2@21.688,15.955
  Bottom Layer w0.305: U2_FT2321.16@17.69,14.171 17.733,14.214 21.473,14.214 v3(21.59,14.097)
DM_FT2322: J1_FT2322.2 U2_FT2322.16 | length 5.8
  Top Layer w0.381: J1_FT2322.2@-12.827,15.942 -12.827,16.002 J1_FT2322.2@-12.7,16.129 ; J1_FT2322.2@-12.76,15.942 -12.76,14.411 v3@-12.7,14.351
  Bottom Layer w0.381: U2_FT2322.16@-16.765,14.285 -12.893,14.285 v3@-12.827,14.351
  other v3: -12.827,14.097
DM_FT2323: J1_FT2323.2 U2_FT2323.16 | length 6.1
  Top Layer w0.381: v3(4.953,14.097) J1_FT2323.2@4.953,15.875
  Bottom Layer w0.381: U2_FT2323.16@0.628,14.158 4.887,14.158 v3@4.953,14.224
DP1: U2_7Seg1.2 U4.55 | length 27.2
  Top Layer w0.305: -2.921,-8.509 -1.835,-7.423 U4.55@-1.835,-6.085
  Top Layer w0.508: U2_7Seg1.2@-22.733,-19.431 -13.843,-19.431 -2.921,-8.509
DP2: U2_7Seg2.2 U4.13 | length 23.8
  Top Layer w0.3: U4.13@7.015,5.165 8.255,5.165 18.669,-5.249 ; 18.669,-5.59 18.669,-5.505
  Top Layer w0.305: 18.669,-5.505 18.669,-5.334
  Top Layer w0.5: 18.669,-5.59 18.669,-7.874 20.574,-9.779 U2_7Seg2.2@23.213,-9.779
DP_FT2321: J1_FT2321.3 U2_FT2321.15 | length 5.5
  Top Layer w0.305: J1_FT2321.3@20.828,15.955 J1_FT2321.3@20.828,16.129
  Top Layer w0.381: v3@19.05,13.589 19.177,13.462 19.812,13.462 20.888,14.538 J1_FT2321.3@20.888,15.955
  Bottom Layer w0.305: U2_FT2321.15@17.69,13.521 17.749,13.462 v3(19.05,13.462) v3@19.177,13.589
DP_FT2322: J1_FT2322.3 U2_FT2322.15 | length 5.4
  Top Layer w0.381: v1(-15.24,13.208) -14.859,13.208 -13.618,14.449 -13.618,14.551 -13.589,14.58 J1_FT2322.3@-13.589,16.002
  Bottom Layer w0.381: U2_FT2322.15@-16.765,13.635 -15.667,13.635 v1(-15.24,13.208)
DP_FT2323: J1_FT2323.3 U2_FT2323.15 | length 5.2
  Top Layer w0.381: v1@1.559,13.243 2.956,13.243 4.191,14.478 4.191,15.715 J1_FT2323.3@4.208,15.731 ; J1_FT2323.3@4.191,15.748 J1_FT2323.3@4.208,15.731 ; J1_FT2323.3@4.208,15.85 J1_FT2323.3@4.208,15.731
  Bottom Layer w0.381: U2_FT2323.15@0.628,13.508 v1@1.056,13.081
  other v1: 1.397,13.081
E1: U2_7Seg1.6 U4.49 | length 20.5
  Top Layer w0.305: -7.302,-7.81 -6.635,-7.143 U4.49@-6.635,-6.085
  Top Layer w0.508: U2_7Seg1.6@-23.086,-14.351 -13.843,-14.351 -7.302,-7.81